# Altium PCB breakout_pcb.PcbDoc
Units mm, origin at the board's own origin, x right, y up, seen from the top; angles counter-clockwise.
Board outline 55.87 x 36.61 mm, 2 copper layers (Top Layer, Bottom Layer), stack 0.303 mm thick; 20 components, 18 nets, 77 pads, 118 vias.
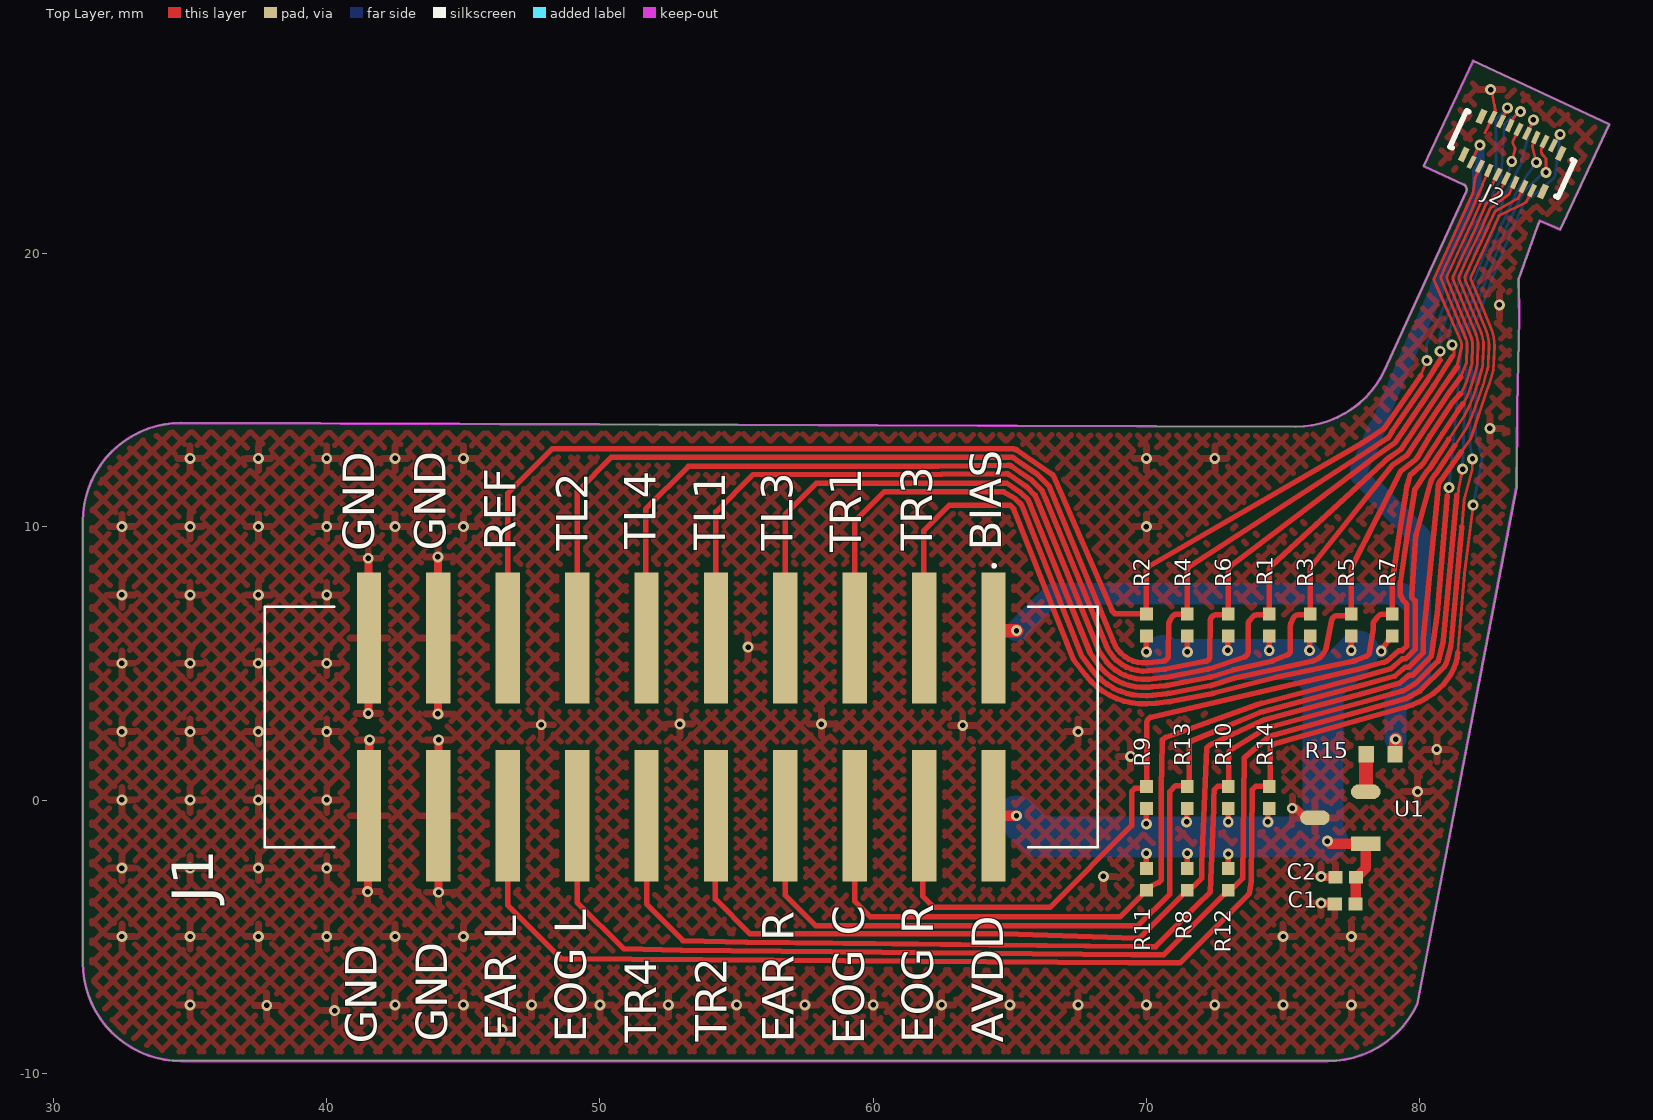
[diagram p0: Top Layer view]
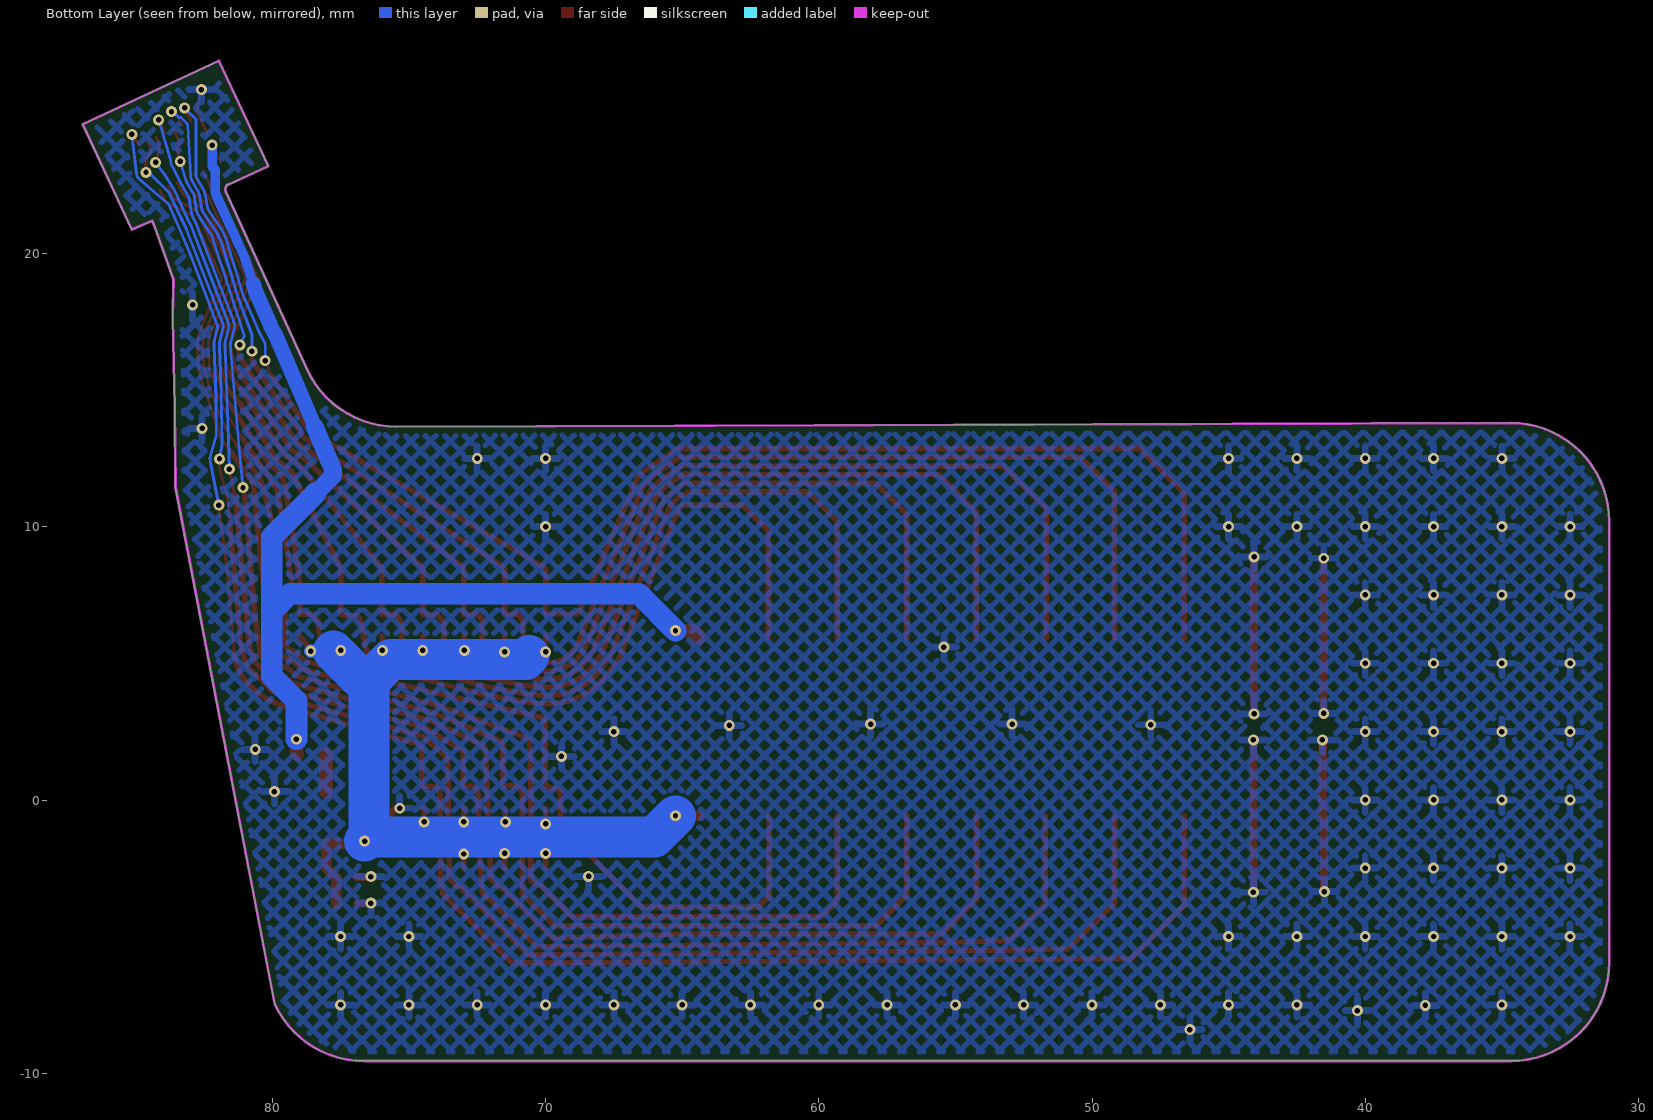
[diagram p1: Bottom Layer view, seen from below]
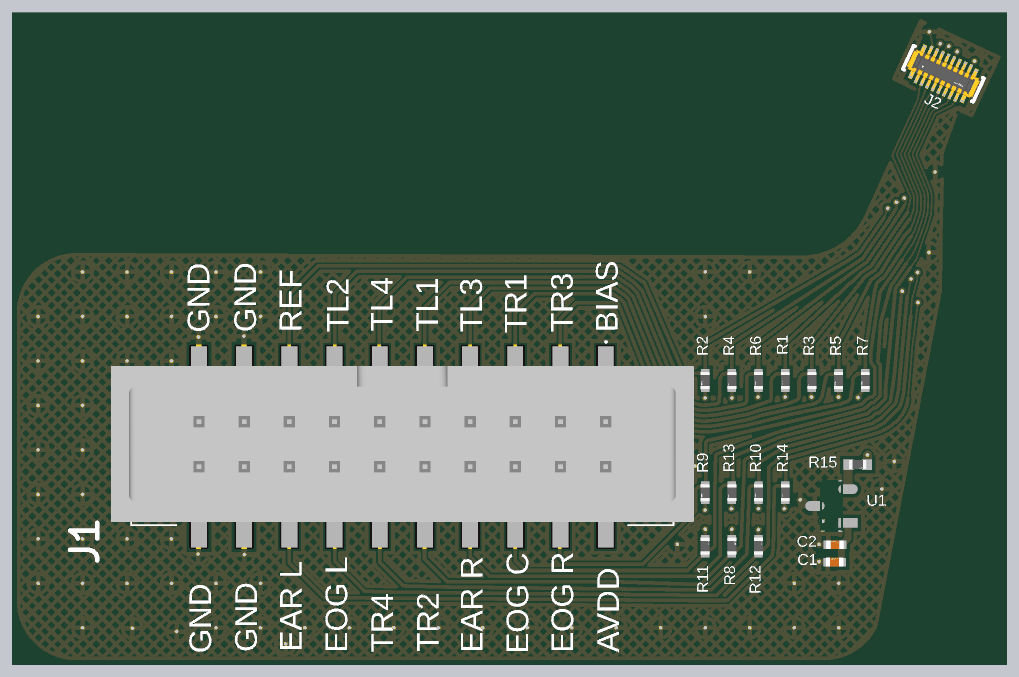
[diagram p2: 3D render of the assembled board from above, using the file's embedded part models]

## Layer stack, top to bottom
Top Coverlay: solder mask 0.0125, FC-001, Dk 4
Adhesive 1: prepreg 0.015, PP-006, Dk 4.1
Top Layer: signal copper 0.018
Adhesive 2: prepreg 0.013, PP-006, Dk 4.1
Dielectric 1: core 0.0125, PI, Dk 4.2
Adhesive 3: prepreg 0.013, PP-006, Dk 4.1
Bottom Layer: signal copper 0.018
Adhesive 4: prepreg 0.015, PP-006, Dk 4.1
Bottom Coverlay: solder mask 0.0125, FC-001, Dk 4
Stiffener 1: core 0.198, Core-009, Dk 4.5

## Board outline
85.146,20.881 85.146,20.88 86.942,24.732 81.958,27.056 80.161,23.205 81.624,22.523 81.625,22.525 81.64,22.515 cw(c81.525,22.352) 81.708,22.271 81.707,22.271 78.729,15.744 cw(c75.468,17.265) 75.468,13.666 34.675,13.8 ccw(c34.675,10.202) 31.076,10.202 31.076,-5.951 ccw(c34.675,-5.951) 34.675,-9.55 76.65,-9.55 ccw(c76.65,-5.951) 79.912,-7.472 83.55,11.45 83.575,14.4 83.65,17.625 83.625,19.075 84.325,21.025 84.4,21.2
board region "Default Layer Stack Region": 79.912,-7.472 83.55,11.45 75.468,13.666 34.675,13.8 34.439,13.8 33.971,13.739 33.516,13.617 33.08,13.436 32.671,13.2 32.297,12.913 31.964,12.579 31.676,12.205 31.441,11.797 31.26,11.361 31.138,10.905 31.076,10.437 31.076,10.202 31.076,-5.951 31.076,-6.187 31.138,-6.655 31.26,-7.111 31.441,-7.546 31.676,-7.955 31.964,-8.329 32.297,-8.663 32.671,-8.95 33.08,-9.186 33.516,-9.366 33.971,-9.488 34.439,-9.55 34.675,-9.55 76.65,-9.55 76.906,-9.55 77.412,-9.478 77.902,-9.335 78.368,-9.124 78.799,-8.849 79.187,-8.516 79.524,-8.132 79.804,-7.704
board region "Layer Stack Region 1": 85.146,20.88 86.942,24.732 81.958,27.056 80.162,23.205 81.624,22.523 81.625,22.525 81.64,22.515 85.146,20.881
board region "Layer Stack Region 2": 84.4,21.2 85.146,20.881 81.64,22.515 81.666,22.493 81.706,22.437 81.724,22.371 81.719,22.303 81.708,22.27 81.707,22.271 78.729,15.744 78.613,15.517 78.335,15.09 77.999,14.706 77.611,14.374 77.181,14.1 76.717,13.89 76.227,13.747 75.723,13.675 75.468,13.666 83.55,11.45 83.575,14.4 83.65,17.625 83.625,19.075 84.325,21.025

## Design rules (kind name [scope] priority, off if disabled: settings)
BoardOutlineClearance [All] p1: gap=0.2 ignorepadtopadclearanceinfootprint=FALSE except(-0.1: Track-SplitContinuation Poly-SplitContinuation; 0.1: Arc-SplitContinuation)
Clearance [All] p1: gap=0.1 ignorepadtopadclearanceinfootprint=FALSE except(0.2: Arc-SMDPad Arc-THPad Track-SMDPad Track-THPad SMDPad-THPad SMDPad-Via SMDPad-Fill SMDPad-Poly SMDPad-Region THPad-Fill THPad-Poly THPad-Region)
ComponentClearance [All] p1: gap=0.1 collisioncheckmode=3 verticalgap=0.254 showdistances=FALSE
DiffPairsRouting [All] p1: maxlimit=0.254 minlimit=0.254 mostfreqgap=0.254 substack1={F7067100-941A-459A-A07F-13557509BD1E} toplayer_{f7067100-941a-459a-a07f-13557509bd1e}_minwidth=0.381 toplayer_{f7067100-941a-459a-a07f-13557509bd1e}_maxwidth=0.381 toplayer_{f7067100-941a-459a-a07f-13557509bd1e}_prefwidth=0.381 bottomlayer_{f7067100-941a-459a-a07f-13557509bd1e}_minwidth=0.381 bottomlayer_{f7067100-941a-459a-a07f-13557509bd1e}_maxwidth=0.381 bottomlayer_{f7067100-941a-459a-a07f-13557509bd1e}_prefwidth=0.381 toplayer_minwidth=0.381 toplayer_maxwidth=0.381 toplayer_prefwidth=0.381 bottomlayer_minwidth=0.381 bottomlayer_maxwidth=0.381 bottomlayer_prefwidth=0.381 substack2={26E46543-D494-4314-9E09-E542AD71FD94} toplayer_{26e46543-d494-4314-9e09-e542ad71fd94}_minwidth=0.381 toplayer_{26e46543-d494-4314-9e09-e542ad71fd94}_maxwidth=0.381 toplayer_{26e46543-d494-4314-9e09-e542ad71fd94}_prefwidth=0.381 bottomlayer_{26e46543-d494-4314-9e09-e542ad71fd94}_minwidth=0.381 bottomlayer_{26e46543-d494-4314-9e09-e542ad71fd94}_maxwidth=0.381 bottomlayer_{26e46543-d494-4314-9e09-e542ad71fd94}_prefwidth=0.381 maxuncoupledlength=12.7
HoleSize [All] p1: absolutevalues=TRUE maxlimit=2.54 minlimit=0.2 maxpercent=80.000 minpercent=20.000
MinimumSolderMaskSliver [All] p1: minsoldermaskwidth=0.1
PolygonConnect [All] p1: connectstyle=Relief reliefconductorwidth=0.254 reliefentries=4 polygonreliefangle="90 Angle" airgapwidth=0.254
RoutingVias [All] p1: holewidth=0.2 width=0.4 viastyle="Through Hole" minholewidth=0.2 minwidth=0.4 maxholewidth=0.2 maxwidth=0.4
SilkToSilkClearance [All] p1: silktosilkclearance=0.1
SilkToSolderMaskClearance [IsPad] p1: minsilkscreentomaskgap=0.1 clearancetoexposedcopper=TRUE
SolderMaskExpansion [All] p1: expansion=0.102 istentingtop=FALSE
Width [All] p1: maxlimit=25 minlimit=0.1 preferedwidth=0.1 substack1={F7067100-941A-459A-A07F-13557509BD1E} substack2={26E46543-D494-4314-9E09-E542AD71FD94}
24 further rules are at their usual default settings.

## Components (designator, comment, footprint, x,y, rotation, side; value= is the part's Value field where it differs from the comment)
C1 "CL05A106MP8NUB8" FP-CL07-IPC_C 77.275,-3.8 r180 top
C2 "CL05A104KA5NNNC" FP-CL278-IPC_C 77.3,-2.825 r180 top
J1 "3020-20-0300-00" 302020030000 52.98,2.825 r180 top
J2 "505070-1622" FP-505070-1622-MFG 83.393,23.648 r335 top
R1 "RR0510P-472-D" FP-RR0510-IPC_C 74.5,6.402 r270 top
R2 "RR0510P-472-D" FP-RR0510-IPC_C 70,6.402 r270 top
R3 "RR0510P-472-D" FP-RR0510-IPC_C 76,6.402 r270 top
R4 "RR0510P-472-D" FP-RR0510-IPC_C 71.5,6.402 r270 top
R5 "RR0510P-472-D" FP-RR0510-IPC_C 77.5,6.402 r270 top
R6 "RR0510P-472-D" FP-RR0510-IPC_C 73,6.402 r270 top
R7 "RR0510P-472-D" FP-RR0510-IPC_C 79,6.402 r270 top
R8 "RR0510P-472-D" FP-RR0510-IPC_C 71.5,-2.902 r90 top
R9 "RR0510P-472-D" FP-RR0510-IPC_C 70,0.098 r270 top
R10 "RR0510P-472-D" FP-RR0510-IPC_C 73,0.098 r270 top
R11 "RR0510P-472-D" FP-RR0510-IPC_C 70,-2.902 r90 top
R12 "RR0510P-472-D" FP-RR0510-IPC_C 73,-2.902 r90 top
R13 "RR0510P-472-D" FP-RR0510-IPC_C 71.5,0.098 r270 top
R14 "RR0510P-472-D" FP-RR0510-IPC_C 74.5,0.098 r270 top
R15 "RR0510P-683-D" FP-RR0510-MFG 78.575,1.675 r0 top
U1 "ISL21080CIH320Z-TK" FP-P3_064A-IPC_C 77.1,-0.649 r180 top

## Footprints (in the part's own frame and the unit in brackets; to place one, negate y for a bottom-side part, rotate by r counter-clockwise, add the part's x,y. Pads: shape width x height; smd on the part's side, far side on the other; paste and mask are expansions set on the pad)
302020030000 [mm]
  rect 0.89x4.8 smd: 1(-11.43,-3.1) 2(-11.43,3.4) 3(-8.89,-3.1) 4(-8.89,3.4) 5(-6.35,-3.1) 6(-6.35,3.4) 7(-3.81,-3.1) 8(-3.81,3.4) 9(-1.27,-3.1) 10(-1.27,3.4) 11(1.27,-3.1) 12(1.27,3.4) 13(3.81,-3.1) 14(3.81,3.4) 15(6.35,-3.1) 16(6.35,3.4) 17(8.89,-3.1) 18(8.89,3.4) 19(11.43,-3.1) 20(11.43,3.4)
  silkscreen extent -15.24,-5.8 15.24,4.55, body extent -16.38,-4.38 16.38,4.38, height 12.59
FP-505070-1622-MFG [mm]
  rect 0.18x0.485 smd paste-1000 mask+0: 1(-1.225,-0.907) 2(-1.225,0.907) 3(-0.875,-0.907) 4(-0.875,0.907) 5(-0.525,-0.907) 6(-0.525,0.907) 7(-0.175,-0.907) 8(-0.175,0.908) 9(0.175,-0.908) 10(0.175,0.907) 11(0.525,-0.907) 12(0.525,0.907) 13(0.875,-0.907) 14(0.875,0.907) 15(1.225,-0.907) 16(1.225,0.907)
  rect 0.23x0.535 smd paste-1000 mask+0: 17(-1.6,0.767) 18(1.6,0.767) 19(-1.6,-0.767) 20(1.6,-0.767)
  silkscreen extent -2.18,-0.73 2.18,0.73, body extent -2.66,-1.25 2.66,1.25, height 0.25
FP-CL07-IPC_C [mm]
  rect 0.515x0.472 smd paste+0 mask+0: 1(-0.379,0) 2(0.379,0)
  body extent -0.74,-0.38 0.74,0.38, height 0.25
FP-CL278-IPC_C [mm]
  rect 0.515x0.472 smd paste+0 mask+0: 1(-0.379,0) 2(0.379,0)
  body extent -0.74,-0.38 0.74,0.38, height 0.25
FP-P3_064A-IPC_C [mm]
  rect 1.084x0.538 smd paste+0 mask+0: 1(-0.93,0.95)
  rrect100% 1.084x0.538 smd paste+0 mask+0: 2(-0.93,-0.95) 3(0.93,0)
  body extent -1.57,-1.56 1.57,1.56, height 0.25
FP-RR0510-IPC_C [mm]
  rect 0.468x0.472 smd paste+0 mask+0: 1(-0.402,0) 2(0.402,0)
  body extent -0.74,-0.38 0.74,0.38, height 0.25
FP-RR0510-MFG [mm]
  rect 0.55x0.6 smd paste+0 mask+0: 1(-0.525,0) 2(0.525,0)
  body extent -0.9,-0.4 0.9,0.4, height 0.25

## Part data
C1: library part CMP-13271-002778-1, "Cap Ceramic 10uF 10V X5R ±20% SMD 0402 +85°C Paper T/R", Capacitance=10uF, Case Code (Imperial)=0402, Case Code (Metric)=1005, Max Operating Temperature=85°C, Min Operating Temperature=-55°C, Tolerance=20%, Voltage Rating=10V, Case/Package=0402, Length=0.039inch, Mount="Surface Mount", Packaging="Tape and Reel", Thickness=0.035inch, Width=0.02inch
C2: library part CMP-13271-000728-1, "Cap Ceramic 100nF 25V X5R ±10% SMD 0402 +85°C Paper T/R", Capacitance=0.1uF, Case Code (Imperial)=0402, Case Code (Metric)=1005, Dielectric=X5R, Max Operating Temperature=85°C, Min Operating Temperature=-55°C, Package Quantity=1, Tolerance=10%, Voltage=25V, Case/Package=0402, Depth=0.5mm, Height=0.5mm, Lead Free="Lead Free", Length=1mm, Mount="Surface Mount", Packaging="Tape and Reel", Radiation Hardening=No, Thickness=0.022inch, Voltage Rating=25V, Voltage Rating (DC)=25V, Width=0.02inch
J1: "Connector", Manufacturer_Name="CNC Tech", Arrow Part Number=3020-20-0300-00, Arrow Price/Stock=https://www.arrow.com/en/products/3020-20-0300-00/cnc-tech-llc?region=nac, Datasheet Link=http://cnctech.us/pdfs/3020-XX-0300-00.pdf, Height=9mm, Manufacturer_Part_Number=3020-20-0300-00
J2: library part CMP-04776-000181-1, "CONN PLUG 16POS SMD GOLD"
R1 R2 R3 R4 R5 R6 R7 R8 R9 R10 R11 R12 R13 R14: library part CMP-2002-01621-2, "4.7kΩ ±0.5% 0.0625W 1/16W Chip Resistor 0402 (1005 Metric) Thin Film", Case Code (Imperial)=0402, Case Code (Metric)=1005, Max Operating Temperature=125°C, Max Power Dissipation=63mW, Min Operating Temperature=-55°C, Package Quantity=1, Resistance=4.7kR, Resistance Tolerance=0.5%, Resistor Type="Thin Film", Temperature Coefficient=25ppm/°C, Voltage Rating=25V, Case/Package=0402, Height=0.016inch, Lead Free="Lead Free", Length=0.039inch, Number of Pins=2, Number of Terminations=2, Packaging="Cut Tape", Power Rating=63mW, RoHS Compliant=Yes, Series=RR, Size Code=0402, Termination=SMD/SMT, Tolerance=0.5%, Voltage Rating (DC)=25V, Weight=2.3E-05oz, Width=0.02inch
R15: library part CMP-2002-01647-2, "68kΩ ±0.5% 0.0625W 1/16W Chip Resistor 0402 (1005 Metric) Thin Film", Case Code (Imperial)=0402, Case Code (Metric)=1005, Max Operating Temperature=125°C, Max Power Dissipation=63mW, Min Operating Temperature=-55°C, Power Rating=62.5mW, Resistance=68kR, Resistance Tolerance=0.5%, Resistor Type="Thin Film", Temperature Coefficient=25ppm/°C, Voltage Rating=25V, Case/Package=0402, Height=0.35mm, Lead Free="Lead Free", Length=1mm, Number of Pins=2, Number of Terminations=2, Packaging="Tape and Reel", RoHS Compliant=Yes, Series=RR, Size Code=0402, Termination=SMD/SMT, Tolerance=0.5%, Voltage Rating (DC)=25V, Weight=2.3E-05oz, Width=0.5mm
U1: library part CMP-13559-000004-1, "IC VREF SERIES 0.3% SOT23-3", Case/Package=TO-236-3, Max Operating Temperature=85°C, Min Operating Temperature=-40°C, Min Output Voltage=2.048V, Operating Supply Current=1.5uA, Output Current=7mA, Temperature Coefficient=50ppm/°C, Tolerance=0.3%, Mount="Surface Mount", Output Type=Fixed, Packaging="Tape and Reel", Reference Type=Series, RoHS Compliant=Yes

## Via types
v1: diameter 0.4, hole 0.2, Top Layer to Bottom Layer, tented both sides, 118 vias

## Nets (pads, with @x,y where several pads share a name; then routed paths per layer and width w, separated by ;. In a path a pad name is that pad's centre, name@x,y a point inside that pad or via, vN(x,y) a via of type N, cw(c..) or ccw(c..) an arc to the next point about the centre after c; other vN are vias at no path point)
ADC_EAR_L: J1.16 J2.16 R14.1 | length 66.8
  Top Layer w0.1: 81.402,5.4 81.645,8.286 cw(c81.745,8.278) 81.645,8.291 v1(81.964,10.795) ; J2.16 84.916,24.024 v1(85.146,24.359)
  Top Layer w0.2: J1.16 46.625,-0.58 46.625,-3.85 48.516,-5.741 48.575,-5.8 69.362,-5.961 69.364,-5.961 71.238,-5.961 73.36,-3.838 73.766,-3.432 73.836,-2.983 73.883,0.383 74,0.5 R14.1 74.542,0.634 74.542,1.942 74.638,2.037 79.49,3.402 ccw(c78.671,6.319) 80.906,4.273 ; 80.906,4.273 ccw(c79.472,5.577) 81.402,5.4
  Bottom Layer w0.1: v1(81.964,10.795) 82.046,11.214 82.212,12.059 82.281,12.416 ccw(c81.938,12.483) 82.275,12.579 82.059,13.342 cw(c82.155,13.369) 82.055,13.37 ; 82.055,13.371 82.07,14.545 82.087,15.261 ; 82.087,15.263 82.14,16.623 ccw(c81.191,16.66) 82.116,16.879 82.01,17.323 cw(c82.108,17.346) 82.014,17.382 82.495,18.64 83.044,20.065 cw(c83.137,20.03) 83.045,20.069 83.39,20.881 83.605,21.388 cw(c83.697,21.349) 83.606,21.392 ; 83.607,21.392 83.801,21.801 cw(c83.892,21.759) 83.827,21.835 ; 83.827,21.835 84.024,22.002 84.855,22.704 ccw(c84.628,22.971) 84.976,22.93 v1(85.146,24.359)
ADC_EAR_R: J1.8 J2.15 R13.1 | length 51.8
  Top Layer w0.1: 81.53,12.741 81.863,13.21 ccw(c81.741,13.297) 81.883,13.249 82.502,15.086 82.526,15.16 82.7,15.715 82.7,15.718 82.709,15.748 ccw(c82.516,15.802) 82.71,15.751 82.698,15.804 ccw(c81.716,15.993) 82.716,15.955 ; 82.252,19.952 81.88,19.141 ccw(c81.97,19.1) 81.878,19.061 82.181,18.327 82.624,17.251 cw(c81.191,16.66) 82.74,16.602 82.716,15.955 ; 82.252,19.953 82.683,20.882 82.687,20.891 ccw(c81.689,21.354) 82.693,20.903 82.811,21.167 82.865,21.285 82.898,21.36 cw(c82.989,21.319) 82.944,21.408 83.898,21.885 83.918,21.927 83.979,22.041 83.982,22.044 83.991,22.055 84.029,22.137 J2.15
  Top Layer w0.2: J1.8 56.79,-3.49 57.9,-4.6 69.7,-4.6 70.85,-3.45 70.85,0.3 71.075,0.525 71.475,0.525 R13.1 71.568,0.634 71.568,1.998 cw(c71.768,1.998) 71.712,2.19 74.162,3.206 74.254,3.237 77.887,4.197 79.098,4.538 79.488,4.866 79.609,4.866 80.136,5.393 80.136,5.928 80.663,11.214 80.672,11.338 ; 80.672,11.339 ccw(c80.523,11.349) 80.672,11.34 80.679,11.456 cw(c81.079,11.432) 80.781,11.699 80.785,11.703 ccw(c79.732,12.626) 80.874,11.816 81.53,12.741
ADC_EOG_CENTER: J1.6 J2.13 R11.1 | length 48.7
  Top Layer w0.1: 81.295,12.976 81.694,13.566 ccw(c81.57,13.65) 81.705,13.586 ; 81.705,13.587 81.9,14.003 82.148,14.677 82.302,15.12 82.326,15.193 82.35,15.267 82.388,15.418 cw(c82.485,15.393) 82.389,15.421 82.48,15.734 ccw(c82.095,15.845) 82.488,15.769 82.502,15.841 ccw(c81.716,15.993) 82.516,15.963 82.54,16.608 ccw(c81.191,16.66) 82.439,17.176 81.996,18.251 81.678,19.022 81.671,19.039 81.67,19.042 81.664,19.095 81.665,19.144 cw(c81.765,19.142) 81.674,19.184 82.271,20.47 82.505,20.974 ccw(c81.689,21.354) 82.515,20.996 82.554,21.086 82.657,21.321 82.67,21.351 82.713,21.437 82.758,21.528 cw(c82.847,21.483) 82.799,21.571 83.608,22.017 83.729,22.277 83.735,22.291 J2.13
  Top Layer w0.2: J1.6 59.325,-0.58 59.325,-3.7 59.9,-4.275 69.029,-4.275 R11.1 70.136,-3.17 70.439,-3.02 70.468,-3.005 70.55,-2.923 70.55,0.424 70.59,2.124 70.592,2.204 70.648,2.26 70.706,2.294 74.1,3.506 74.205,3.537 77.845,4.497 78.946,4.807 79.364,5.166 79.485,5.166 79.836,5.517 79.836,7.287 79.778,7.345 79.711,7.413 79.711,7.502 79.866,9.683 79.871,9.702 80.292,11.214 80.405,11.62 cw(c81.079,11.432) 80.557,11.898 80.56,11.902 ccw(c79.732,12.626) 80.644,12.01 81.295,12.976
ADC_EOG_L: J1.14 J2.14 R12.1 | length 62.3
  Top Layer w0.1: 81.55,10 81.624,10.94 cw(c81.724,10.933) 81.627,10.958 ; 81.627,10.959 81.696,11.214 81.913,12.021 ccw(c81.575,12.112) 81.924,12.1 81.933,12.338 v1(81.938,12.483) ; J2.14 84.497,23.922 84.476,23.876 ccw(c84.703,23.771) 84.529,23.591 84.625,23.482 v1(84.628,22.971)
  Top Layer w0.2: J1.14 49.17,-3.745 50.866,-5.441 52.976,-5.5 69.486,-5.661 69.488,-5.661 70.643,-5.661 72.864,-3.441 72.864,-3.438 72.865,-3.437 72.867,-3.437 R12.1 73.134,-3.17 73.224,-3.17 73.536,-2.858 73.588,1.541 73.645,1.598 74.513,2.337 78.047,3.307 79.412,3.691 ccw(c78.671,6.319) 79.536,3.729 80.001,3.986 80.931,4.915 ccw(c78.389,6.058) 81.01,5.11 81.014,5.126 81.151,5.655 81.475,9.166 81.494,9.368 81.553,10
  Bottom Layer w0.1: 81.85,12.98 ccw(c81.95,12.979) 81.852,12.962 v1(81.938,12.483) ; 81.85,12.981 81.876,14.968 cw(c81.976,14.967) 81.876,14.97 ; 81.876,14.971 81.88,15.08 81.941,16.631 ccw(c81.191,16.66) 81.921,16.833 81.802,17.337 cw(c81.899,17.36) 81.807,17.399 82.273,18.619 83.15,20.898 83.151,20.901 83.183,20.967 83.776,22.214 83.794,22.232 84.502,22.941 84.533,22.971 84.574,22.971 v1(84.628,22.971)
ADC_EOG_R: J1.4 J2.11 R9.1 | length 44.9
  Top Layer w0.1: 81.071,13.2 81.648,14.072 ccw(c81.398,14.237) 81.649,14.073 81.653,14.08 ccw(c81.52,14.151) 81.654,14.084 81.825,14.423 81.948,14.717 82.119,15.207 ccw(c82.025,15.24) 82.121,15.212 82.287,15.788 ccw(c82.095,15.845) 82.292,15.807 82.306,15.879 ccw(c81.716,15.993) 82.316,15.97 82.34,16.616 ccw(c81.191,16.66) 82.278,17.036 ccw(c81.191,16.66) 82.254,17.099 81.44,19.075 cw(c81.532,19.114) 81.441,19.156 81.86,20.058 82.324,21.059 ccw(c81.689,21.354) 82.331,21.074 82.505,21.473 82.557,21.593 82.578,21.64 cw(c82.67,21.6) 82.61,21.68 83.272,22.176 83.349,22.342 83.355,22.348 83.395,22.433 83.444,22.525 J2.11
  Top Layer w0.2: J1.4 61.825,-0.62 61.825,-3.525 62.1,-3.8 62.1,-3.808 62.217,-3.925 66.475,-3.925 69.464,-0.936 69.464,0.307 69.581,0.424 69.864,0.424 69.864,0.439 R9.1@70.016,0.591 ; R9.1 R9.1@70.016,0.591 ; 81.071,13.2 80.399,12.184 cw(c79.732,12.626) 80.335,12.1 80.333,12.097 ccw(c81.079,11.432) 80.253,11.995 79.855,11.412 79.83,11.375 79.804,11.214 79.575,9.816 79.302,7.977 79.302,7.863 79.3,7.86 79.3,7.482 79.411,7.288 79.478,7.221 79.536,7.163 79.536,5.642 79.36,5.466 79.24,5.466 78.79,5.075 78.703,5.05 77.748,4.783 70.18,3.034 ccw(c70.223,2.839) 70.082,2.981 ccw(c70.223,2.839) 70.023,2.839 70.023,0.598 R9.1@70.016,0.591
ADC_REF: J1.15 J2.4 R2.1 | length 58.2
  Top Layer w0.1: 80.042,15.53 ccw(c79.98,15.608) 80.051,15.538 v1(80.267,16.08) ; J2.4 83.033,24.961 83.215,25.254 v1(83.215,25.335)
  Top Layer w0.2: J1.15 46.63,11.23 48.249,12.849 65.14,12.849 cw(c65.14,12.649) 65.253,12.813 65.265,12.805 cw(c65.152,12.64) 65.266,12.805 66.544,11.925 66.559,11.915 66.599,11.875 68.743,6.945 68.759,6.91 68.785,6.884 68.844,6.825 69.864,6.825 R2.1 70,8.385 cw(c70.2,8.385) 70.1,8.558 77.875,13.05 78.671,13.573 ccw(c78.561,13.74) 78.732,13.637 78.738,13.647 cw(c79.167,13.39) 78.75,13.666 78.754,13.671 cw(c78.92,13.561) 78.756,13.674 ; 78.756,13.675 80.024,15.501 ccw(c79.86,15.615) 80.029,15.509 80.042,15.53
  Bottom Layer w0.1: v1(80.267,16.08) 80.267,16.704 80.311,16.802 80.462,17.075 ccw(c80.046,17.305) 80.472,17.095 80.493,17.138 ccw(c80.067,17.348) 80.503,17.159 81.073,18.472 ccw(c80.637,18.661) 81.092,18.524 81.42,19.618 81.65,20.387 81.704,20.563 81.765,20.683 81.837,20.84 81.859,20.874 82.358,21.62 82.387,21.763 82.466,22.157 cw(c83.25,22) 82.554,22.395 82.629,22.525 82.781,22.789 ccw(c82.695,22.839) 82.795,22.839 ; 82.795,22.84 82.795,22.843 82.795,24.915 v1(83.215,25.335)
ADC_TL1: J1.9 J2.3 R1.1 | length 51.2
  Top Layer w0.1: 81.35,15.825 81.442,16.168 ccw(c81.2,16.233) 81.444,16.179 81.533,16.585 ccw(c81.191,16.66) 81.511,16.802 80.621,18.819 80.534,19.016 cw(c80.625,19.057) 80.534,19.098 81.471,21.151 81.737,21.735 81.896,22.082 81.935,22.166 ccw(c81.708,22.271) 81.944,22.19 81.948,22.202 81.956,22.224 ccw(c81.719,22.305) 81.967,22.273 82,22.525 82.032,22.776 82.144,23.016 J2.3 ; 81.375,15.85 81.407,15.9
  Top Layer w0.2: J1.9 54.25,10.55 55.614,11.914 62.5,11.914 62.506,11.92 64.861,11.947 cw(c64.863,11.747) 64.952,11.925 64.993,11.9 65.592,11.487 65.607,11.477 65.932,11.151 66.046,10.891 68.247,5.497 68.401,5.254 ccw(c69.919,6.219) 70.077,4.428 70.089,4.429 70.686,4.49 ccw(c70.603,5.286) 70.754,4.5 72.222,4.781 ccw(c72.128,5.272) 72.287,4.798 72.289,4.799 73.589,5.239 ccw(c73.525,5.428) 73.725,5.428 73.725,6.429 cw(c73.925,6.429) 73.77,6.555 73.889,6.701 cw(c74.045,6.575) 74.045,6.775 74.364,6.775 R1.1 74.5,8.412 cw(c74.7,8.412) 74.564,8.559 78.675,12.35 78.789,12.463 cw(c79,12.25) 78.833,12.499 79.301,12.818 ccw(c79.188,12.984) 79.355,12.873 80.756,14.971 81.354,15.823 81.375,15.85
ADC_TL2: J1.13 J2.6 R4.1 | length 58.6
  Top Layer w0.1: 80.75,16.1 v1(80.75,16.425) ; J2.6 83.39,24.86 83.429,24.943 83.62,25.201 83.692,25.201 v1(83.695,25.198)
  Top Layer w0.2: J1.13 49.175,5.93 49.175,11.3 50.424,12.549 65.044,12.549 cw(c65.046,12.349) 65.159,12.514 65.262,12.443 65.977,11.95 65.992,11.94 66.437,11.495 66.646,11.015 68.796,5.8 ccw(c69.919,6.219) 70.041,5.027 70.624,5.087 ccw(c70.603,5.286) 70.803,5.281 ; 70.803,5.282 70.824,6.447 cw(c71.024,6.444) 70.851,6.545 70.942,6.7 cw(c71.115,6.6) 71.115,6.8 71.364,6.8 R4.1 71.5,8.391 cw(c71.7,8.391) 71.591,8.559 78.15,12.8 78.826,13.248 ccw(c78.716,13.415) 78.887,13.312 78.996,13.493 ; 78.996,13.493 cw(c79.167,13.39) 79.005,13.506 79.005,13.508 80.271,15.331 ccw(c79.86,15.615) 80.284,15.352 80.75,16.1
  Bottom Layer w0.1: v1(80.75,16.425) 80.75,17.034 81.269,18.419 81.273,18.43 81.721,19.92 81.85,20.346 81.915,20.501 81.987,20.616 82.031,20.752 82.508,21.47 82.542,21.522 82.575,21.575 ccw(c82.481,21.608) 82.579,21.592 82.657,22.092 cw(c83.25,22) 82.727,22.295 82.86,22.525 82.954,22.688 ccw(c82.695,22.839) 82.994,22.822 83.098,24.687 cw(c83.198,24.682) 83.127,24.752 83.129,24.754 83.351,24.976 83.422,24.976 83.644,25.198 v1(83.695,25.198)
ADC_TL3: J1.7 J2.5 R3.1 | length 48.9
  Top Layer w0.1: 81.5,15.475 81.625,15.764 81.69,15.953 ; 81.7,15.95 81.716,16.012 ; 81.716,15.993 81.741,16.64 ccw(c81.191,16.66) 81.7,16.87 80.816,19.014 80.785,19.089 cw(c80.877,19.127) 80.786,19.169 80.891,19.399 80.927,19.477 81.78,21.312 ; 81.78,21.312 ccw(c81.689,21.354) 81.781,21.314 82.049,21.929 82.102,22.048 82.12,22.09 ccw(c81.708,22.271) 82.121,22.092 82.307,22.525 82.332,22.613 ; 82.332,22.614 82.452,22.873 J2.5
  Top Layer w0.2: J1.7 56.79,10.465 57.925,11.6 64.899,11.6 65.399,11.256 65.414,11.245 65.68,10.979 65.746,10.828 67.95,5.37 68.204,5.01 ccw(c69.919,6.219) 70.076,4.127 70.104,4.129 70.224,4.14 70.712,4.191 ccw(c70.603,5.286) 70.81,4.205 71.449,4.328 72.278,4.486 ccw(c72.128,5.272) 72.328,4.498 ccw(c72.128,5.272) 72.362,4.507 72.364,4.508 73.187,4.762 cw(c73.275,4.475) 73.208,4.767 74.589,5.085 74.591,5.085 ccw(c74.5,5.475) 74.647,5.103 74.649,5.104 75.149,5.303 ; 75.149,5.303 ccw(c75.075,5.488) 75.275,5.488 75.275,6.384 cw(c75.475,6.384) 75.291,6.463 75.373,6.653 cw(c75.557,6.575) 75.557,6.775 75.864,6.775 R3.1 76,8.43 cw(c76.2,8.43) 76.044,8.555 79,12.25 ; 79.001,12.251 79.518,12.603 ccw(c79.405,12.768) 79.572,12.657 81.101,14.941 81.483,15.456 81.5,15.475
ADC_TL4: J1.11 J2.8 R6.1 | length 54.8
  Top Layer w0.1: v1(81.191,16.66) 81.249,16.603 81.249,16.501 81.262,16.488 81.262,16.283 81.2,16.233 ; v1(83.376,23.375) 83.494,23.815 ccw(c83.397,23.841) 83.487,23.886 83.412,24.037 83.412,24.1 83.537,24.369 J2.8
  Top Layer w0.2: J1.11 51.675,5.96 51.675,10.65 53.239,12.214 62.006,12.214 62.375,12.218 64.952,12.248 cw(c64.955,12.048) 65.068,12.213 ; 65.068,12.212 65.377,12 65.784,11.719 65.799,11.708 66.185,11.323 66.346,10.953 68.542,5.626 68.564,5.579 ccw(c69.919,6.219) 70.074,4.729 70.655,4.788 ; 70.656,4.789 ccw(c70.603,5.286) 70.697,4.795 72.165,5.076 ccw(c72.128,5.272) 72.328,5.268 ; 72.328,5.269 72.347,6.577 cw(c72.547,6.575) 72.547,6.775 72.864,6.775 R6.1 73,8.4 cw(c73.2,8.4) 73.08,8.56 78.4,12.575 79.071,13.054 ccw(c78.955,13.217) 79.12,13.104 80.521,15.166 ccw(c79.86,15.615) 80.534,15.185 ccw(c79.86,15.615) 80.536,15.188 81.2,16.233
  Bottom Layer w0.1: v1(81.191,16.66) 81.047,16.943 81.036,16.965 81.036,16.989 81.036,17.005 82.115,20.314 82.224,20.648 82.658,21.32 82.725,21.425 82.757,21.475 82.772,21.537 ccw(c82.481,21.608) 82.772,21.539 ccw(c82.481,21.608) 82.777,21.563 82.855,22.061 cw(c83.25,22) 82.906,22.204 83.091,22.525 83.128,22.589 ccw(c82.695,22.839) 83.174,22.696 v1(83.376,23.375)
ADC_TR1: J1.5 J2.7 R5.1 | length 46.7
  Top Layer w0.1: 81.5,14.875 81.55,14.925 81.747,15.368 ; 81.741,15.379 81.885,15.871 81.89,15.886 ; 81.884,15.871 ccw(c81.7,15.95) 81.887,15.878 81.89,15.886 ; 81.894,15.9 cw(c81.7,15.95) 81.892,15.894 81.89,15.886 ; 82.641,22.469 82.667,22.525 82.771,22.724 J2.7 ; 82.645,22.479 82.312,22.024 ccw(c82.393,21.965) 82.301,22.005 82.254,21.896 82.233,21.849 82.201,21.777 81.964,21.234 cw(c81.689,21.354) 81.961,21.227 81.899,21.094 81.037,19.235 81.004,19.165 ccw(c81.095,19.123) 81.003,19.086 81.11,18.826 81.885,16.946 cw(c81.191,16.66) 81.941,16.631 81.916,15.985 cw(c81.716,15.993) 81.902,15.919 81.89,15.886
  Top Layer w0.2: J1.5 59.33,10.205 60.405,11.28 63.191,11.28 64.78,11.275 65.122,11.082 65.206,11.024 65.221,11.014 65.428,10.807 65.446,10.766 67.653,5.244 68.001,4.78 ccw(c69.919,6.219) 70.024,3.823 70.232,3.832 70.746,3.893 70.748,3.893 ccw(c70.603,5.286) 70.866,3.911 72.334,4.192 ccw(c72.128,5.272) 72.452,4.221 73.267,4.473 cw(c73.326,4.281) 73.283,4.477 76.06,5.084 ccw(c75.908,5.782) 76.565,5.501 76.792,6.591 cw(c76.988,6.55) 76.798,6.613 cw(c76.988,6.55) 76.988,6.75 77.364,6.75 R5.1 77.5,8.452 cw(c77.7,8.452) 77.522,8.543 79.325,12.05 79.832,12.441 ccw(c79.709,12.6) 79.861,12.47 cw(c81.079,11.432) 79.882,12.493 ccw(c79.732,12.626) 79.903,12.523 ; 79.904,12.524 80.379,13.323 cw(c80.551,13.222) 80.385,13.333 81.191,14.536 ; 81.191,14.536 cw(c81.358,14.426) 81.211,14.561 81.492,14.866 81.5,14.875
ADC_TR2: J1.10 J2.10 R8.1 | length 57
  Top Layer w0.1: 81,11.05 81.017,11.133 81.034,11.214 v1(81.079,11.432) ; J2.10 84.017,24.571 v1(84.166,24.891)
  Top Layer w0.2: J1.10 54.225,-0.6 54.225,-3.625 55.5,-4.9 64.769,-4.9 69.655,-5.061 69.741,-5.061 71.498,-3.304 R8.1 71.636,-3.212 71.669,-3.212 71.753,-3.141 cw(c71.882,-3.294) 71.754,-3.14 71.86,-3.035 72.036,-2.858 72.036,-2.33 72.213,1.917 72.268,1.972 72.326,2.009 74.247,2.905 74.318,2.937 77.965,3.908 79.255,4.27 79.613,4.566 79.733,4.566 80.424,5.256 80.646,6.82 81.017,11.133
  Bottom Layer w0.1: v1(81.079,11.432) 81.237,13.034 ; 81.237,13.034 81.237,13.036 81.54,16.631 ccw(c81.191,16.66) 81.541,16.646 ccw(c81.191,16.66) 81.532,16.741 81.382,17.371 cw(c81.48,17.395) 81.386,17.43 81.405,17.479 82.728,20.927 82.751,20.988 82.78,21.059 82.812,21.127 82.825,21.154 82.881,21.269 82.928,21.363 82.944,21.396 82.967,21.491 ccw(c82.481,21.608) 82.975,21.531 83.052,22.03 cw(c83.25,22) 83.078,22.102 ccw(c82.906,22.204) 83.08,22.105 83.301,22.489 ccw(c82.695,22.839) 83.318,22.521 83.321,22.525 83.611,23.095 cw(c83.968,22.913) 83.644,23.149 83.659,23.169 ccw(c83.376,23.375) 83.726,23.362 83.726,23.365 cw(c84.275,23.337) 83.748,23.495 v1(84.166,24.891)
ADC_TR3: J1.3 J2.9 R7.1 | length 44.7
  Top Layer w0.1: 81.575,14.5 81.742,14.765 81.927,15.27 81.934,15.291 ; 81.935,15.292 ccw(c81.84,15.325) 81.936,15.297 82.095,15.845 ; 82.097,15.868 ccw(c81.716,15.993) 82.116,15.978 82.14,16.624 ccw(c81.191,16.66) 82.069,17.023 81.221,19.081 cw(c81.313,19.119) 81.223,19.161 81.248,19.216 81.448,19.647 81.762,20.323 82.143,21.143 ccw(c81.689,21.354) 82.148,21.154 82.353,21.625 82.406,21.744 82.416,21.769 ; 82.416,21.769 82.437,21.816 82.438,21.819 cw(c82.53,21.779) 82.464,21.855 82.934,22.261 ccw(c82.868,22.337) 82.959,22.295 83.063,22.525 83.087,22.577 J2.9
  Top Layer w0.2: J1.3 61.85,5.945 61.85,9.85 62.782,10.782 65.028,10.782 65.146,10.665 67.337,5.141 67.794,4.556 ccw(c69.919,6.219) 70.023,3.523 70.36,3.536 70.78,3.595 ccw(c70.603,5.286) 70.922,3.616 72.39,3.897 ccw(c72.128,5.272) 72.468,3.914 72.47,3.915 ; 72.472,3.915 74.731,4.486 cw(c74.78,4.292) 74.739,4.488 ; 74.739,4.488 77.581,5.083 ccw(c77.5,5.475) 77.645,5.102 77.647,5.103 78.073,5.27 78.161,5.358 78.3,6.262 78.3,6.428 cw(c78.5,6.428) 78.346,6.556 78.49,6.728 cw(c78.644,6.6) 78.644,6.8 78.864,6.8 R7.1 79,7.985 79.019,8.117 79.275,9.84 79.292,9.958 79.493,11.214 79.504,11.284 79.538,11.48 79.548,11.518 79.654,11.889 80.037,12.222 ccw(c79.709,12.6) 80.088,12.273 cw(c81.079,11.432) 80.108,12.296 80.11,12.298 ccw(c79.732,12.626) 80.149,12.351 80.855,13.416 81.398,14.237 ; 81.398,14.238 cw(c81.65,14.075) 81.401,14.243 81.575,14.5
ADC_TR4: J1.12 J2.12 R10.1 | length 59.2
  Top Layer w0.1: 81.395,11.214 81.429,11.287 81.426,11.358 cw(c81.626,11.364) 81.43,11.404 v1(81.575,12.112) ; J2.12 84.18,24.069 84.159,24.024 ccw(c84.386,23.919) 84.143,23.857 v1(84.275,23.337)
  Top Layer w0.2: J1.12 51.71,-3.81 53.041,-5.141 55.376,-5.2 69.53,-5.36 69.611,-5.361 69.612,-5.361 70.338,-5.361 71.86,-3.838 72.341,-3.357 72.461,-0.321 72.464,-0.201 72.464,0.054 72.475,0.065 72.492,0.383 72.609,0.5 R10.1 73.022,0.634 73.022,1.695 cw(c73.222,1.695) 73.17,1.888 73.178,1.891 73.193,1.895 74.402,2.637 78.005,3.607 79.331,3.98 ccw(c78.671,6.319) 79.412,4.004 79.875,4.284 80.679,5.087 ccw(c78.389,6.058) 80.724,5.201 80.863,5.818 80.866,5.831 81.355,11.127 ; 81.355,11.128 81.361,11.148 81.369,11.156
  Bottom Layer w0.1: v1(81.575,12.112) 81.595,12.676 81.709,15.894 ; 81.709,15.894 81.741,16.636 ccw(c81.191,16.66) 81.726,16.787 81.597,17.334 81.599,17.39 81.605,17.42 cw(c81.899,17.36) 81.618,17.466 81.619,17.468 82.121,18.782 82.951,20.947 82.98,21.013 83.032,21.118 83.094,21.246 83.134,21.331 83.576,22.297 83.636,22.391 83.967,22.912 v1(84.275,23.337)
AGND: C1.2 C2.2 J1.17 J1.18 J1.19 J1.20 J2.2 U1.3 | length 26.3
  Top Layer w0.1: 82.4,24.425 82.449,24.524 ccw(c82.36,24.568) 82.45,24.526 ; 82.451,24.526 82.585,24.814 J2.2 82.757,25.158 82.78,25.208 82.78,25.24 82.74,25.446 82.637,25.966 82.609,25.994 v1@82.601,25.999
  Top Layer w0.3: v1(41.5,-3.35) 41.519,-3.331 41.519,-0.606 J1.20 41.563,-0.563 41.563,2.188 v1(41.575,2.2) ; v1(41.525,3.175) 41.538,3.188 41.538,5.913 J1.19 41.538,5.937 41.538,8.837 v1(41.525,8.85) ; v1(44.075,3.15) 44.083,3.157 J1.17@44.083,5.917 ; v1(44.075,8.9) 44.083,8.892 J1.17@44.083,5.933 ; v1(44.1,-3.375) 44.095,-3.37 44.095,-0.58 J1.18 44.095,-0.57 44.095,2.195 v1(44.1,2.2) ; v1(75.343,-0.3) 75.362,-0.319 75.503,-0.319 75.787,-0.604 76.125,-0.604 U1.3 ; v1(76.4,-3.775) 76.412,-3.787 76.884,-3.787 C1.2 ; v1(76.4,-2.8) 76.412,-2.812 76.909,-2.812 C2.2
  other v1: 46.425,-8.4 40.297,-7.703 35.006,-7.494 37.808,-7.517 42.506,-7.494 45.006,-7.494 47.506,-7.494 50.006,-7.494 52.506,-7.494 55.006,-7.494 57.506,-7.494 60.006,-7.494 62.506,-7.494 65.006,-7.494 67.506,-7.494 70.006,-7.494 72.506,-7.494 75.006,-7.494 77.506,-7.494 32.506,-4.994 35.006,-4.994 37.506,-4.994 40.006,-4.994 42.506,-4.994 45.006,-4.994 75.006,-4.994 77.506,-4.994 68.431,-2.794 32.506,-2.494 35.006,-2.494 37.506,-2.494 40.006,-2.494 32.506,0.006 35.006,0.006 37.506,0.006 40.006,0.006 79.931,0.306 69.425,1.6 80.631,1.856 32.506,2.506 35.006,2.506 37.506,2.506 40.006,2.506 67.506,2.506 63.281,2.731 47.856,2.756 52.931,2.781 58.106,2.781 32.506,5.006 35.006,5.006 37.506,5.006 40.006,5.006 55.425,5.6 32.506,7.506 35.006,7.506 37.506,7.506 40.006,7.506 32.506,10.006 35.006,10.006 37.506,10.006 40.006,10.006 42.506,10.006 45.006,10.006 70.006,10.006 35.006,12.506 37.506,12.506 40.006,12.506 42.506,12.506 45.006,12.506 70.006,12.506 72.506,12.506 82.575,13.6 82.925,18.125 82.6,26
AVDD: C1.1 C2.1 J1.2 R1.2 R2.2 R3.2 R4.2 R5.2 R6.2 R7.2 R8.2 R9.2 R10.2 R11.2 R12.2 R13.2 R14.2 U1.1 | length 38.7
  Top Layer w0.2: R11.2 v1(70,-1.95) ; v1(70,-0.875) R9.2 ; v1(70,5.425) R2.2 ; v1(71.475,-0.8) 71.487,-0.788 71.487,-0.317 R13.2 ; R8.2 v1(71.5,-1.95) ; v1(71.5,5.425) R4.2 ; v1(72.975,5.475) 72.975,5.866 R6.2 ; R12.2 v1(73,-1.975) ; v1(73,-0.8) R10.2 ; v1(74.45,-0.8) 74.45,-0.438 R14.2 ; v1(74.5,5.475) R1.2 ; v1(75.975,5.475) 75.975,5.866 R3.2 ; v1(77.5,5.475) R5.2 ; v1(78.6,5.45) 78.864,5.866 R7.2
  Top Layer w0.4: J1.2 v1(65.25,-0.575) ; v1(76.625,-1.5) 76.724,-1.599 U1.1 78.03,-2.495 77.7,-2.825 C2.1 77.666,-2.838 77.666,-3.788 C1.1
  Bottom Layer w0.5: 77.775,5.45 v1(78.6,5.45)
  Bottom Layer w1.5: v1(65.25,-0.575) 66.025,-1.35 76.475,-1.35 ; 70.603,5.286 70.739,5.15 75.675,5.15 76.475,4.35 76.475,4.15 ; v1(76.625,-1.5) 76.475,-1.35 ; 77.775,5.45 76.475,4.15 ; 76.475,-1.35 76.475,4.15
BIAS: J1.1 J2.1 R15.2 | length 41.9
  Top Layer w0.1: J2.1 81.979,23.518 82.065,23.703 82.086,23.767 82.086,23.771 82.206,23.892 v1(82.206,23.973)
  Top Layer w0.5: J1.1 64.41,6.005 64.605,6.2 v1(65.25,6.2) ; R15.2 79.125,1.7 v1(79.125,2.225)
  Bottom Layer w0.35: 80.708,18.906 80.744,19.032 81.015,19.851 81.219,20.297 81.23,20.308 81.244,20.34 81.262,20.381 81.41,20.717 81.496,20.905 82.049,22.115 ccw(c81.525,22.352) 82.05,22.117 ccw(c81.525,22.352) 82.1,22.349 82.1,22.525 82.1,23.073 82.206,23.179 v1(82.206,23.973)
  Bottom Layer w0.55: 78.455,13.666 79.792,16.808 79.922,17.094 80.046,17.305 80.092,17.42 80.637,18.661 80.708,18.906
  Bottom Layer w0.65: 78.437,11.214 77.775,11.876 77.775,12.07 78.455,13.666
  Bottom Layer w0.8: v1(65.25,6.2) 66.6,7.55 79.364,7.55 80.025,6.889 ; 78.438,11.214 80.025,9.626 80.025,6.889 ; v1(79.125,2.225) 79.125,3.632 80.025,4.532 80.025,6.889
NetR15_1: R15.1 U1.2 | length 1.4
  Top Layer w0.5: U1.2 78.04,0.311 78.04,1.665 R15.1
pads on no net: J2.17 J2.18 J2.19 J2.20

## Polygon pours and split planes (outlines as drawn)
AGND on Bottom Layer "AGND_L02_P000" (hatched 45Degree grid 0.508 track 0.203, pour order 0): 19.123,-13.412 94.474,-14.39 91.4,51.2 16.935,47.459
AGND on Top Layer "AGND_L01_P001" (hatched 45Degree grid 0.508 track 0.203, pour order 1): 18.273,-13.612 93.624,-14.59 90.55,51 16.085,47.259

## Keep-outs
Keep-Out Layer:
  lines w0.1: 81.623,22.52 80.162,23.205 81.958,27.056 86.942,24.732 85.146,20.88 ; 81.625,22.525 cw(c81.525,22.352) 81.708,22.27 ; 81.707,22.271 78.729,15.744 cw(c75.468,17.265) 75.468,13.666 34.675,13.8 ccw(c34.675,10.202) 31.076,10.202 31.076,-5.951 ccw(c34.675,-5.951) 34.675,-9.55 76.65,-9.55 ccw(c76.65,-5.951) 79.912,-7.472 83.55,11.45 83.575,14.4 83.65,17.625 83.625,19.075 84.325,21.025 84.4,21.2 85.146,20.881 ; 85.146,20.881 85.146,20.88

## Silkscreen, mask and mechanical layers (free items; w line width, h text height)
Top Overlay:
  text "TL4" at 52.425,9.175 h2 r90
  text "TL1" at 54.975,9.15 h2 r90
  text "GND" at 44.753,9.125 h2 r90
  text "REF" at 47.3,9.125 h2 r90
  text "TL2" at 49.95,9.125 h2 r90
  text "TL3" at 57.453,9.125 h2 r90
  text "TR3" at 62.553,9.125 h2 r90
  text "BIAS" at 65.078,9.125 h2 r90
  text "GND" at 42.128,9.1 h2 r90
  text "TR1" at 59.95,9.075 h2 r90
  text "EAR L" at 47.325,-8.825 h2 r90
  text "GND" at 44.803,-8.85 h2 r90
  text "TR2" at 55.025,-8.85 h2 r90
  text "EOG L" at 49.878,-8.875 h2 r90
  text "TR4" at 52.45,-8.875 h2 r90
  text "EAR R" at 57.475,-8.875 h2 r90
  text "AVDD" at 65.15,-8.877 h2 r90
  text "EOG R" at 62.578,-8.9 h2 r90
  text "GND" at 42.228,-8.925 h2 r90
  text "EOG C" at 60.053,-8.95 h2 r90
Mechanical 10:
  lines w0.1: 81.623,22.52 81.625,22.525 ; 81.625,22.525 cw(c81.525,22.352) 81.708,22.27 81.707,22.271 78.729,15.744 cw(c75.468,17.265) 75.468,13.666 83.55,11.45 83.575,14.4 83.612,16.013 83.65,17.625 83.638,18.35 83.625,19.075 84.325,21.025 84.4,21.2 81.625,22.525
  text "2 layer flex stackup" at 64.998,20.375 h2
  text "no stiffener" at 64.998,18.513 h2
Mechanical 12:
  lines w0.1: 81.707,22.271 81.708,22.27 ccw(c81.525,22.352) 81.625,22.525 ; 81.625,22.525 85.146,20.881 ; 81.625,22.525 81.623,22.52 80.162,23.205 81.958,27.056 86.942,24.732 85.146,20.88 ; 85.146,20.881 85.146,20.88 ; 31.076,-5.951 ccw(c34.675,-5.951) 34.675,-9.55 76.65,-9.55 ccw(c76.65,-5.951) 79.912,-7.472 83.55,11.45 75.468,13.666 34.675,13.8 ccw(c34.675,10.202) 31.076,10.202 31.076,-5.951
  text "2 layer flex stackup" at 85,27.5 h2
  text "with stiffener on bottom" at 85,25.638 h2
  text "2 layer flex stackup" at 27.5,17.5 h2
  text "with stiffener on bottom" at 27.5,15.638 h2